# Allegro board mainBoard2.brd
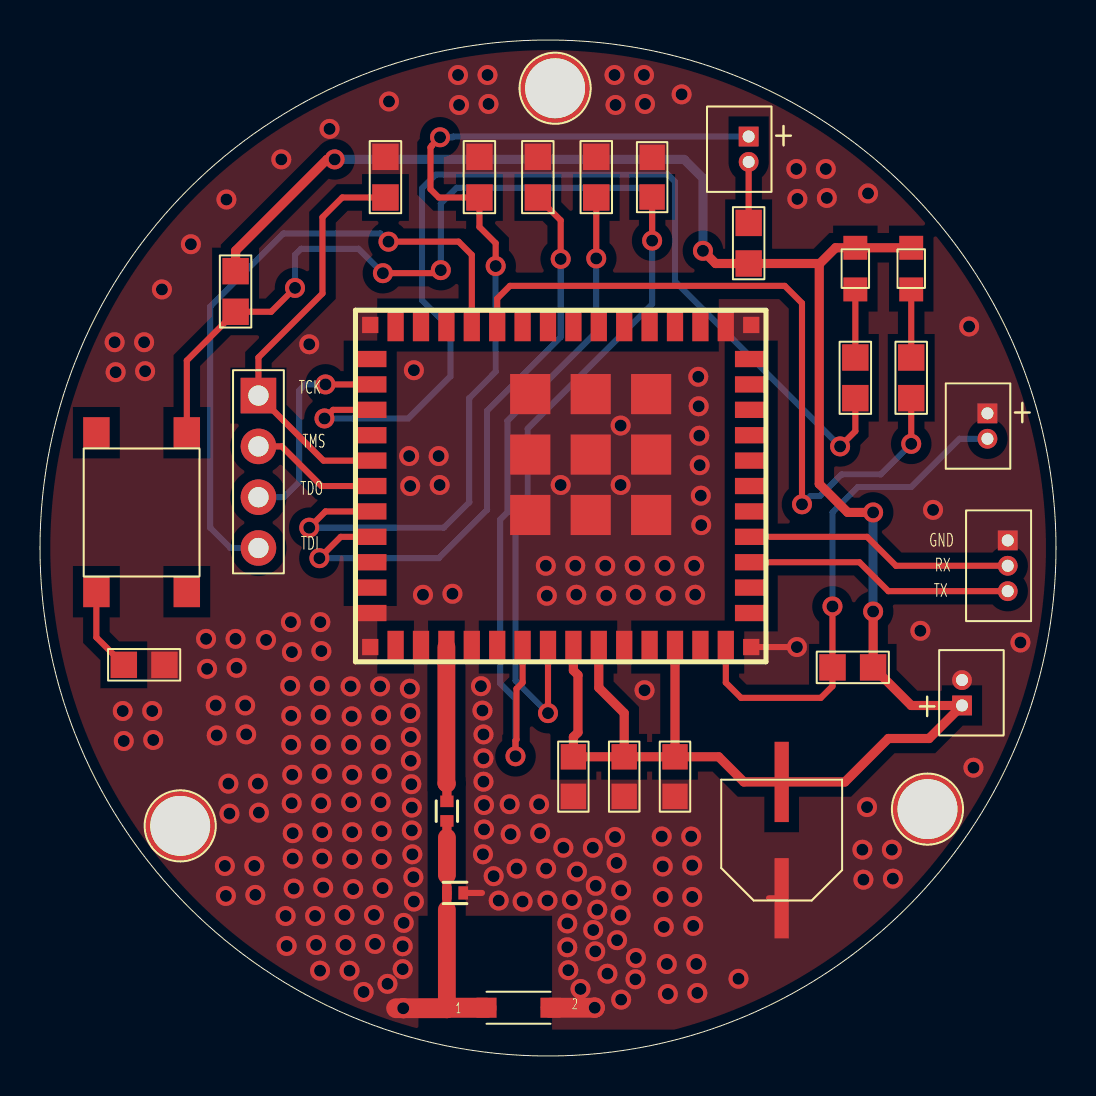
[diagram p0: board, top side]
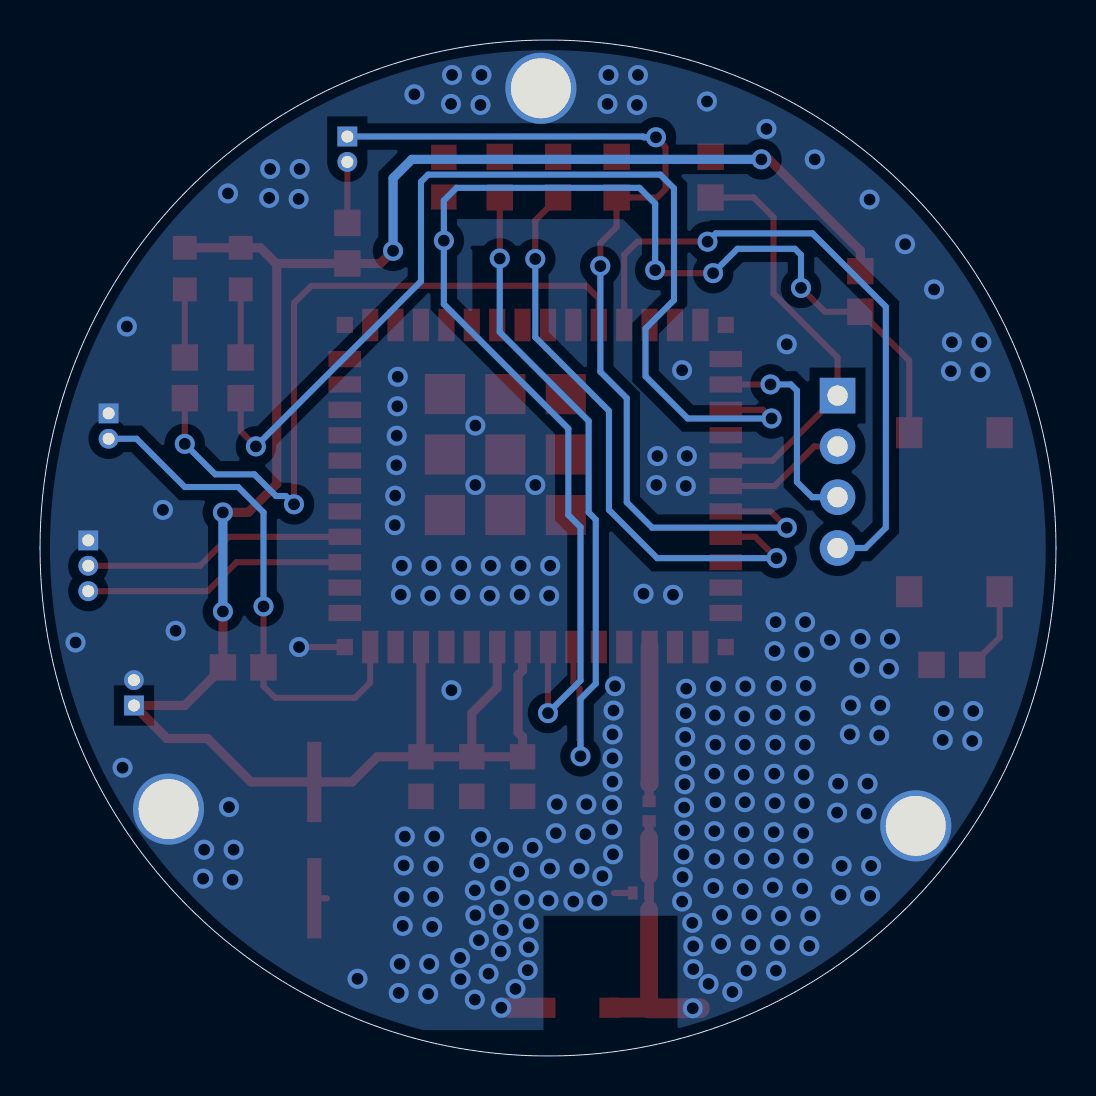
[diagram p1: board, bottom side, seen from below]

Outline 50.8 x 50.8 mm; copper layers: TOP, BOTTOM. Coordinates in mm from the lower left corner of the outline.
Outline path: circle c25.4,25.4 r25.4

## Placement (name value [footprint] x y rotation side)
C1  220uF/16V  [CAPPOL220U16V]  37.08 10.79 0 top
C2  0.1uF  [SMC0805]  29.21 13.97 270 top
C3  0.1uF  [SMC0805]  31.75 13.97 270 top
C4  1pF  [INDC_0402CS]  20.75 8.15 0 top
C5  0.1uF  [SMC0805]  30.61 43.94 90 top
C6  0.1uF  [SMC0805]  26.67 13.97 270 top
D1  -  [LED]  43.56 39.37 270 top
D2  -  [LED]  40.77 39.37 270 top
J1  HEADER 2  [HEADER21P25MM]  47.37 31.5 0 top
J2  HEADER 3  [HEADER31P25MM]  48.39 24.51 0 top
J3  HEADER 4  [HEADER42P54MM]  10.92 29.21 0 top
J4  HEADER 2  [HEADER21P25MM]  35.43 45.34 0 top
J5  HEADER 2  [HEADER21P25MM]  46.1 18.16 180 top
J6  HEADER 1  [HOLD]  44.37 12.34 0 top
J7  HEADER 1  [HOLD]  7.01 11.51 0 top
J8  HEADER 1  [HOLD]  25.76 48.39 0 top
L1  3.6nH  [CC0402]  20.35 12.24 270 top
R1  75  [SMR0805]  43.56 33.91 90 top
R2  75  [SMR0805]  40.77 33.91 90 top
R3  4.7K  [SMR0805]  9.78 38.23 270 top
R4  100R  [SMR0805]  5.21 19.56 0 top
R5  4.7K  [SMR0805]  35.43 40.64 90 top
R6  4.7K  [SMR0805]  40.64 19.43 180 top
R7  100K  [SMR0805]  17.27 43.94 90 top
R8  2.7K  [SMR0805]  21.97 43.94 90 top
R9  100K  [SMR0805]  24.89 43.94 90 top
R10  100K  [SMR0805]  27.81 43.94 90 top
S1  SW PUSHBUTTON  [BUTTON]  5.08 27.18 270 top
U1  -  [CC3200MOD]  35.56 20.45 0 top
U2  2.45-GHz Ant  [ANT_AH316M]  23.93 2.41 0 top

## Library data of the parts
C1 = CAPACITOR POL
C2-C6 = CAP NP
D1 D2 = LED_0
J1 J4 J5 = HEADER 2
J2 = HEADER 3
J3 = HEADER 4
J6-J8 = HEADER 1
L1 = INDUCTOR
R1-R4 R7-R10 = RESISTOR_0
R5 R6 = R
S1 = SW PUSHBUTTON
U1 = CC3200MOD_0
U2 = 2_0.45-GHz Ant

## Footprints (pads in the part's own frame, mm; a bottom-side part is the same pattern mirrored in y, then rotated)
ANT_AH316M
  rect 1.001x1.001 smd: 1(-1.6,0) 2(1.6,0)
BUTTON
  rect 1.549x1.321 smd: (-3.988,-2.261) (3.962,2.261) 1(-3.988,2.261) 2(3.962,-2.261)
CAPPOL220U16V
  rect 0.711x4.013 smd: 1(0,2.908) 2(0,-2.908)
CC0402
  rect 0.579x0.66 smd: 1(-0.49,0) 2(0.49,0)
CC3200MOD
  rect 0.813x0.813 smd: 1(0,16.104) 16(-19.05,16.104) 28(-19.05,0) 43(0,0)
  rect 0.813x1.626 smd: 2(-1.27,16.104) 3(-2.54,16.104) 4(-3.81,16.104) 5(-5.08,16.104) 6(-6.35,16.104) 7(-7.62,16.104) 8(-8.89,16.104) 9(-10.16,16.104) 10(-11.43,16.104) 11(-12.7,16.104) 12(-13.97,16.104) 13(-15.24,16.104) 14(-16.51,16.104) 15(-17.78,16.104) 29(-17.78,0) 30(-16.51,0) 31(-15.24,0) 32(-13.97,0) 33(-12.7,0) 34(-11.43,0) 35(-10.16,0) 36(-8.89,0) 37(-7.62,0) 38(-6.35,0) 39(-5.08,0) 40(-3.81,0) 41(-2.54,0) 42(-1.27,0)
  rect 1.626x0.813 smd: 17(-19.05,14.402) 18(-19.05,13.132) 19(-19.05,11.862) 20(-19.05,10.592) 21(-19.05,9.322) 22(-19.05,8.052) 23(-19.05,6.782) 24(-19.05,5.512) 25(-19.05,4.242) 26(-19.05,2.972) 27(-19.05,1.702) 44(0,1.702) 45(0,2.972) 46(0,4.242) 47(0,5.512) 48(0,6.782) 49(0,8.052) 50(0,9.322) 51(0,10.592) 52(0,11.862) 53(0,13.132) 54(0,14.402)
  rect 2.007x2.007 smd: 55(-5.004,12.649) 56(-8.026,12.649) 57(-11.049,12.649) 58(-5.004,9.627) 59(-8.026,9.627) 60(-11.049,9.627) 61(-5.004,6.604) 62(-8.026,6.604) 63(-11.049,6.604)
HEADER21P25MM
  rect 0.991x0.991 hole 0.599: 1(0,0.635)
  round 0.991 hole 0.599: 2(0,-0.635)
HEADER31P25MM
  rect 0.991x0.991 hole 0.599: 1(0,1.27)
  round 0.991 hole 0.599: 2(0,0) 3(0,-1.27)
HEADER42P54MM
  rect 1.778x1.778 hole 1.016: 1(0,3.81)
  round 1.778 hole 1.016: 2(0,1.27) 3(0,-1.27) 4(0,-3.81)
HOLD
  round 3.556 hole 2.997: 1(0,0)
INDC_0402CS
  rect 0.483x0.66 smd: 1(-0.409,0) 2(0.409,0)
LED
  rect 1.194x1.194 smd: 1(-1.041,0) 2(1.041,0)
SMC0805
  rect 1.27x1.27 smd: 1(-0.991,0) 2(0.991,0)
SMR0805
  rect 1.321x1.321 smd: 1(-1.016,0) 2(1.016,0)

## Nets
GND: C1.2 C2.2 C3.2 C4.1 C4.2 C5.2 C6.2 J1.1 J2.1 J5.2 J6.1 J7.1 J8.1 L1.2 R4.2 R7.2 R8.2 R9.2 R10.2 U1.1(GND2) U1.2(GND1) U1.16(GND18) U1.27(GND4) U1.28(GND7) U1.30(GND3) U1.32(GND8) U1.38(GND6) U1.43(GND5) U1.55(GND17) U1.56(GND16) U1.57(GND15) U1.58(GND14) U1.59(GND13) U1.60(GND12) U1.61(GND11) U1.62(GND10) U1.63(GND9) U2.1(IN) U2.2(GND)
VCC_3.3V: C1.1 C2.1 C3.1 C6.1 D1.1 D2.1 J5.1 R3.1 R5.1 R6.1 U1.36(VBAT_DCDC_ANA) U1.37(VBAT_DCDC_PA) U1.40(VBAT_DCDC_DIG_IO)
NLINK: R1.1 U1.11(GPIO22)
NREADY: R2.1 U1.19(GPIO28)
NRESET: C5.1 R3.2 S1.1 U1.35(NRESET)
SOP2: J4.1 R8.1 U1.23(TCXO_EN/SOP2)
SWITCH: J1.2 R6.2 U1.42(GPIO30)
UART0_RX: J2.2 U1.47(GPIO2)
UART0_TX: J2.3 U1.46(GPIO1)
N01152: R4.1 S1.2
N10829: J3.1 R7.1 U1.21(JTAG_TCK)
N10833: J3.2 U1.22(JTAG_TMS)
N10837: J3.3 U1.18(JTAG_TDO)
N10841: J3.4 U1.12(JTAG_TDI)
N12921: L1.1 U1.31(RF_BG)
N18108: R10.1 U1.34(SOP0)
N18112: R9.1 U1.24(SOP1)
N33058: J4.2 R5.2
N545706: D1.2 R1.2
N545710: D2.2 R2.2

Pads without a net: U1 3 4 5 6 7 8 9 10 13 14 15 17 20 25 26 29 33 39 41 44 45 48 49 50 51 52 53 54

## Via types
v1: diameter 1.001, hole 0.599, TOP to BOTTOM, 224 vias

## Routing (per net, layer and track width the routed paths; a pad name or vN(x,y) marks a point on that pad's centre or on a via; arc(x,y) is an arc through that point)
GND: length 20
  TOP w0.305: 36.45,7.89 C1.2 ; v1(37.85,20.45) U1.43 ; C4.2 22.1,8.15
  TOP w0.457: 20.34,7.32 C4.1 20.34,9.04 20.35,9.04 ; L1.2 20.35,10.92
  TOP w0.889: 20.34,2.54 20.34,7.32 ; 20.35,10.92 20.35,9.04
  TOP w0.991: U2.1 20.34,2.41 ; 20.34,2.41 20.34,2.39 v1(18.16,2.39) 17.81,2.39 ; 20.34,2.41 20.34,2.54 ; U2.2 v1(27.74,2.41) 27.74,2.44
  vias: v1(3.73,35.69) v1(3.78,34.19) v1(4.14,17.25) v1(4.19,15.75) v1(5.2,35.69) v1(5.26,34.24) v1(5.61,17.25) v1(5.66,15.8) v1(6.1,38.33) v1(7.54,40.59) v1(8.3,20.86) v1(8.35,19.36) v1(8.79,17.53) v1(8.84,16.03) v1(9.24,9.5) v1(9.32,42.82) v1(9.29,8) v1(9.42,13.62) v1(9.47,12.12) v1(9.78,20.86) v1(9.83,19.41) v1(10.26,17.53) v1(10.31,16.08) v1(10.72,9.5) v1(10.77,8.05) v1(10.89,13.62) v1(10.94,12.17) v1(11.3,20.8) v1(12.06,44.83) v1(12.28,7) v1(12.33,5.5) v1(12.55,21.69) v1(12.51,18.51) v1(12.6,20.2) v1(12.56,17.01) v1(12.56,15.56) v1(12.61,14.06) v1(12.59,12.64) v1(12.64,11.14) v1(12.64,9.87) v1(12.69,8.37) v1(13.46,35.59) v1(13.75,7) v1(13.8,5.55) v1(14.02,21.69) v1(13.98,18.51) v1(14.03,17.06) v1(14.03,15.56) v1(14,4.26) v1(14.07,20.25) v1(14.08,14.11) v1(14.06,12.64) v1(14.11,11.19) v1(14.11,9.87) v1(14.16,8.42) v1(14.48,46.35) v1(15.23,7.05) v1(15.28,5.55) v1(15.53,18.48) v1(15.48,4.26) v1(15.58,16.98) v1(15.56,15.56) v1(15.61,14.06) v1(15.56,12.69) v1(15.61,11.19) v1(15.61,9.85) v1(15.66,8.35) v1(16.18,3.2) v1(16.7,7.05) v1(16.75,5.6) v1(17.01,18.48) v1(17.03,15.56) v1(17.03,12.69) v1(17.06,17.03) v1(17.08,14.11) v1(17.08,11.24) v1(17.08,9.85) v1(17.13,8.4) v1(17.45,47.73) v1(17.37,3.61) v1(18.14,5.49) v1(18.14,4.34) v1(18.19,6.65) v1(18.46,30) v1(18.51,28.5) v1(18.49,18.36) v1(18.52,17.14) v1(18.54,15.95) v1(18.54,14.76) v1(18.57,13.59) v1(18.59,12.42) v1(18.59,11.28) v1(18.62,10.08) v1(18.69,34.29) v1(18.67,8.94) v1(18.69,7.72) v1(19.15,23.06) v1(19.93,30) v1(19.98,28.55) v1(20.62,23.11) v1(20.9,49.05) v1(20.95,47.55) v1(22.05,18.49) v1(22.12,17.27) v1(22.15,10.08) v1(22.17,16.08) v1(22.17,14.88) v1(22.17,13.72) v1(22.2,12.55) v1(22.2,11.33) v1(22.37,49.05) v1(22.43,47.6) v1(22.68,8.99) v1(22.94,7.77) v1(23.48,12.59) v1(23.53,11.09) v1(23.83,9.37) v1(24.13,7.72) v1(24.96,12.59) v1(25.01,11.14) v1(25.29,24.51) v1(25.34,23.01) v1(25.31,9.37) v1(25.37,7.77) v1(26.04,28.55) v1(26.17,10.41) v1(26.37,6.63) v1(26.37,5.44) v1(26.42,4.29) v1(26.59,7.8) v1(26.76,24.51) v1(26.81,23.06) v1(26.85,9.22) v1(27.03,3.35) v1(27.64,10.41) v1(27.66,6.3) v1(27.79,8.51) v1(27.76,5.23) v1(27.86,7.32) v1(28.26,24.51) v1(28.31,23.01) v1(28.37,4.11) v1(28.72,49.05) v1(28.78,47.55) v1(28.75,10.95) v1(28.83,9.65) v1(28.85,5.79) v1(29.03,31.52) v1(29.03,28.55) v1(29.03,7.04) v1(29.06,8.28) v1(29.06,2.82) v1(29.74,24.51) v1(29.79,23.06) v1(29.79,4.9) v1(29.77,3.84) v1(30.2,49.05) v1(30.25,47.6) v1(30.23,18.29) v1(31.09,10.98) v1(31.14,9.48) v1(31.14,7.95) v1(31.23,24.51) v1(31.19,6.45) v1(31.29,23.01) v1(31.34,4.6) v1(31.39,3.1) v1(32.08,48.08) v1(32.56,10.98) v1(32.61,9.53) v1(32.61,7.95) v1(32.71,24.51) v1(32.66,6.5) v1(32.76,23.06) v1(32.81,4.6) v1(32.91,33.96) v1(32.93,32.49) v1(32.87,3.15) v1(32.96,31.01) v1(32.98,29.54) v1(33.04,28.02) v1(33.06,26.54) v1(34.92,3.86) v1(37.82,44.35) v1(37.87,42.85) v1(39.29,44.35) v1(39.34,42.9) v1(41.12,10.31) v1(41.17,8.82) v1(41.4,43.13) v1(41.35,12.45) v1(42.59,10.31) v1(42.64,8.87) v1(44.02,21.26) v1(44.65,27.3) v1(46.46,36.47) v1(46.67,14.41) v1(49.02,20.68)
VCC_3.3V: length 107.3
  TOP w0.457: 38.96,39.6 38.94,39.62 R5.1 33.78,39.62 v1(33.15,40.26) ; 38.96,39.6 39.78,40.41 D2.1 D1.1 ; 38.96,39.6 38.96,28.6 40.39,27.18 v1(41.66,27.18) ; C2.1 C6.1 26.67,15.95 26.9,16.18 26.9,19.05 26.67,19.28 U1.36 ; C2.1 C3.1 ; C2.1 29.21,17.14 27.94,18.41 U1.37 ; v1(14.73,44.83) 14.35,44.83 9.78,40.26 R3.1 ; v1(41.66,22.22) R6.1 43.56,17.53 J5.1 44.45,15.87 42.42,15.87 40.25,13.7 C1.1 35.19,13.7 33.93,14.96 C3.1 ; C3.1 U1.40
  BOTTOM w0.457: v1(33.15,40.26) 33.15,43.89 32.21,44.83 v1(14.73,44.83) ; v1(41.66,22.22) v1(41.66,27.18)
NLINK: length 36.2
  TOP w0.305: U1.11 22.86,37.87 23.49,38.51 37.24,38.51 38.1,37.64 v1(38.1,27.58) ; v1(43.56,30.61) R1.1
  BOTTOM w0.305: v1(38.1,27.58) 38.51,28 39,28 40.08,29.08 42.04,29.08 v1(43.56,30.61)
NREADY: length 52.1
  TOP w0.305: v1(40,30.48) 40.77,31.24 R2.1 ; v1(14.22,31.88) 14.66,32.31 U1.19
  BOTTOM w0.305: v1(14.22,31.88) 18.41,31.88 20.52,33.99 20.52,36.37 19.1,37.8 19.1,43.38 19.79,44.07 31.39,44.07 31.75,43.71 31.75,38.73 v1(40,30.48)
NRESET: length 69.3
  TOP w0.305: v1(12.75,38.4) 11.56,37.21 R3.2 7.34,34.77 S1.1 ; v1(20.04,39.29) 19.89,39.14 v1(17.14,39.14) ; U1.35 v1(25.4,17.14) ; v1(30.61,40.77) C5.1
  BOTTOM w0.305: v1(25.4,17.14) 23.77,18.77 23.77,26.44 24.38,27.05 24.38,31.37 30.61,37.59 v1(30.61,40.77) 30.61,42.77 29.97,43.41 20.83,43.41 20.04,42.62 v1(20.04,39.29) ; v1(12.75,38.4) 12.75,40.06 13.06,40.36 15.93,40.36 v1(17.14,39.14)
SOP2: length 48.9
  TOP w0.305: v1(20,45.94) 19.59,45.52 19.59,45.5 19.52,45.43 19.52,43.34 19.94,42.93 R8.1 21.97,41.45 22.78,40.64 v1(22.78,39.5) ; v1(13.46,26.42) 14.27,27.23 U1.23
  BOTTOM w0.305: v1(22.78,39.5) 22.78,34.21 21.46,32.89 21.46,27.69 20.19,26.42 v1(13.46,26.42) ; v1(20,45.94) 20.61,45.94 20.65,45.97 J4.1
SWITCH: length 25.6
  TOP w0.305: U1.42 34.29,18.67 35.05,17.91 39.04,17.91 39.62,18.49 R6.2 v1(39.62,22.48)
  BOTTOM w0.305: J1.2 45.97,30.86 43.56,28.45 40.89,28.45 39.62,27.18 v1(39.62,22.48)
UART0_RX: length 13.4
  TOP w0.305: J2.2 42.8,24.51 41.35,25.96 U1.47
UART0_TX: length 13.4
  TOP w0.305: J2.3 42.42,23.24 40.97,24.69 U1.46
N01152: length 4.2
  TOP w0.305: 4.19,19.56 2.82,20.93 S1.2
N10829: length 20.7
  TOP w0.305: U1.21 14.17,29.77 J3.1 10.92,34.92 14.12,38.13 14.12,41.94 15.11,42.93 R7.1
N10833: length 6.4
  TOP w0.305: U1.22 14.07,28.5 12.09,30.48 J3.2
N10837: length 10.6
  TOP w0.305: U1.18 v1(14.27,33.58)
  BOTTOM w0.305: J3.3 12.19,27.94 12.95,28.7 12.95,33.27 13.26,33.58 v1(14.27,33.58)
N10841: length 32.4
  TOP w0.305: U1.12 21.59,40.06 20.93,40.72 v1(17.42,40.72)
  BOTTOM w0.305: J3.4 9.52,25.4 8.51,26.42 8.51,37.46 12.17,41.13 17.01,41.13 v1(17.42,40.72)
N12921: length 7.7
  TOP w0.457: 20.35,13.61 L1.1
  TOP w0.889: 20.35,13.61 20.32,13.64 U1.31
N18108: length 35.9
  TOP w0.305: U1.34 24.13,18.67 23.83,18.36 23.83,15.82 23.77,15.77 v1(23.77,14.99) ; v1(27.81,39.88) R10.1
  BOTTOM w0.305: v1(23.77,14.99) 23.77,17.86 23.01,18.62 23.01,26.82 23.37,27.18 23.37,31.75 27.81,36.2 v1(27.81,39.88)
N18112: length 30
  TOP w0.305: R9.1 26.04,41.78 v1(26.04,39.85) ; v1(13.97,24.89) 15.04,25.96 U1.24
  BOTTOM w0.305: v1(26.04,39.85) 26.04,35.94 22.35,32.26 22.35,27.3 19.94,24.89 v1(13.97,24.89)
N33058: length 3
  TOP w0.305: R5.2 J4.2
N545706: length 3.4
  TOP w0.305: R1.2 D1.2
N545710: length 3.4
  TOP w0.305: R2.2 D2.2

## Copper pours and planes (outline as drawn; the poured copper is in the pictures)
GND on TOP: 25.6,1.32 25.6,7.01 21.29,7.01 21.29,13.94 19.38,13.94 19.38,7.01 18.92,7.01 18.92,1.37 25.5,50.29 31.72,1.32 ; 7 cut-outs
GND on BOTTOM: 25.63,1.3 25.63,7.01 18.92,7.01 18.92,1.37 25.55,50.29 31.62,1.3 ; 5 cut-outs

## Text on the board
Ref Des/Silkscreen Top: TCK | TDO | TDI | TMS | GND | TX | RX
